# EAGLE board Maze Solver (EAGLE 9.7.0)

Size 395.68 x 148.72 mm. Coordinates in mm from the lower left corner, seen from the top.
Outline: 0,0 395.68,0 395.68,148.72 0,148.72 0,0
Copper layers (1*16): Top 0.035mm / dielectric 1.5mm / Bottom 0.035mm
Design rules "default": minimum track width 6mil, minimum drill 0.35mm, track to track 6mil, track to pad 6mil, pad to pad 6mil, via to via 6mil, smd to smd 6mil, copper to edge 40mil, drill to drill 6mil, minimum pad ring 10mil, minimum via ring 8mil, stop-mask expansion 4mil, vias tented up to drill 0mil, thermal gap 10mil

## Footprints (pad centres in the part's own frame; a part is rotated, then mirrored left to right if it is on the bottom)
BATTERY-GENERIC = drill 1.118 pad 3.15 octagon: + 2.54,0; - -2.54,0
HC-SR04 = drill 1.016 long: 1 -3.81,0; 2 -1.27,0; 3 1.27,0; 4 3.81,0
MOTOR = drill 1.118 pad 3.15 octagon: + 2.54,0; - -2.54,0
RESAD1016W63L850D250B = drill 0.83 pad 1.43: 1 -5.08,0; 2 5.08,0
HA-06-SM065 = drill 1 pad 1.676: 1 -2.54,-2.54; 2 0,2.54; 3 2.54,-2.54
ARDUINO-UNO-R3-SHIELD = drill 1.016 pad 1.88: 3.3V 24.13,-2.54; 5V 24.13,0; A0 24.13,12.7; A1 24.13,15.24; A2 24.13,17.78; A3 24.13,20.32; A4 24.13,22.86; A5 24.13,25.4; AREF -24.13,-13.97; D2 -24.13,20.32; D3 -24.13,17.78; D4 -24.13,15.24; D5 -24.13,12.7; D6 -24.13,10.16; D7 -24.13,7.62; D8 -24.13,3.81; D9 -24.13,1.27; D10 -24.13,-1.27; D11 -24.13,-3.81; D12 -24.13,-6.35; D13 -24.13,-8.89; GND@0 24.13,2.54; GND@1 24.13,5.08; GND@2 -24.13,-11.43; IOREF 24.13,-7.62; NC 24.13,-10.16; RES 24.13,-5.08; RX -24.13,25.4; SCL -24.13,-19.05; SDA -24.13,-16.51; TX -24.13,22.86; VIN 24.13,7.62
DIP762W53P254L1969H508Q16B = drill 0.743 pad 1.343: 1 -3.81,8.89; 2 -3.81,6.35; 3 -3.81,3.81; 4 -3.81,1.27; 5 -3.81,-1.27; 6 -3.81,-3.81; 7 -3.81,-6.35; 8 -3.81,-8.89; 9 3.81,-8.89; 10 3.81,-6.35; 11 3.81,-3.81; 12 3.81,-1.27; 13 3.81,1.27; 14 3.81,3.81; 15 3.81,6.35; 16 3.81,8.89
JHD-162A = drill 1.016 long: 1 -19.05,0; 2 -16.51,0; 3 -13.97,0; 4 -11.43,0; 5 -8.89,0; 6 -6.35,0; 7 -3.81,0; 8 -1.27,0; 9 1.27,0; 10 3.81,0; 11 6.35,0; 12 8.89,0; 13 11.43,0; 14 13.97,0; 15 16.51,0; 16 19.05,0

## Placement (x,y rotation side)
BAT1  9V  [BATTERY-GENERIC]  146.99,70.8 180 top
DIST1  DISTANCE-SENSOR-4PINHC-SR04  [HC-SR04]  346.43,108.37 0 top
DIST2  DISTANCE-SENSOR-4PINHC-SR04  [HC-SR04]  346.43,80.43 180 top
DIST3  DISTANCE-SENSOR-4PINHC-SR04  [HC-SR04]  388.06,94.47 270 top
M2  MOTOR_HDR  [MOTOR]  168.84,89.9 180 top
M4  MOTOR_HDR  [MOTOR]  168.66,115.42 0 top
M6  MOTOR_HDR  [MOTOR]  112.95,116.03 0 top
M7  MOTOR_HDR  [MOTOR]  112.95,90.63 180 top
R4  1k  [RESAD1016W63L850D250B]  53.9,44.12 90 top
RPOT1  250k  [HA-06-SM065]  85.01,93.17 0 top
U1  ARDUINO-UNO-R3-SHIELD  [ARDUINO-UNO-R3-SHIELD]  29.84,100.84 180 top
U2  L293E  [DIP762W53P254L1969H508Q16B]  139.62,102.06 90 top
U3  LCD-16X2JHD-162A  [JHD-162A]  34.85,36.63 0 top
U7  ARDUINO-UNO-R3-SHIELD  [ARDUINO-UNO-R3-SHIELD]  259.38,92.18 270 top

## Library data of the parts
BAT1 DIST1-DIST3 M2 M4 M6 M7 R4 RPOT1 U1-U3 U7 = Tinkercad

## Nets
BAT1+: BAT1.+ U2.8 U2.16
BAT1-: BAT1.- U2.4 U2.5 U2.12 U2.13
M2_+: M2.+ M7.+ U2.3
M2_-: M2.- M7.- U2.6
M4_+: M4.+ M6.+ U2.11
M4_-: M4.- M6.- U2.14
U1_5V: RPOT1.1 U1.5V U3.2 U3.15
U1_A0: U1.A0 U3.6
U1_A1: U1.A1 U3.11
U1_A2: U1.A2 U3.12
U1_A3: U1.A3 U3.13
U1_A4: U1.A4 U3.14
U1_A5: RPOT1.2 U1.A5
U1_D2: U1.D2 U2.7
U1_D3: U1.D3 U2.1
U1_D4: U1.D4 U2.10
U1_D5: U1.D5 U2.15
U1_D6: U1.D6 U2.9
U1_D7: U1.D7 U2.2
U1_D13: U1.D13 U3.4
U1_GND: R4.2 RPOT1.3 U1.GND@0 U1.GND@1 U1.GND@2 U3.1 U3.3 U3.5
U3_LED-: R4.1 U3.16
U7_5V: DIST1.1 DIST2.1 DIST3.1 U7.5V
U7_D2: DIST2.3 U7.D2
U7_D3: DIST2.2 U7.D3
U7_D4: DIST1.3 U7.D4
U7_D5: DIST1.2 U7.D5
U7_D6: DIST3.3 U7.D6
U7_D7: DIST3.2 U7.D7
U7_D11: U1.D8 U7.D11
U7_D12: U1.D9 U7.D12
U7_D13: U1.D10 U7.D13
U7_GND: DIST1.4 DIST2.4 DIST3.4 U7.GND@0 U7.GND@1 U7.GND@2
U7_TX: U1.RX U7.TX

## Tracks (layer width: path | path; a pad name or v marks a point on that pad's centre or on a via)
BAT1+  (2 unrouted)
BAT1-  (4 unrouted)
M2_+  (2 unrouted)
M2_-  (2 unrouted)
M4_+  (2 unrouted)
M4_-  (2 unrouted)
U1_5V  (3 unrouted)
U1_A0  (1 unrouted)
U1_A1  (1 unrouted)
U1_A2  (1 unrouted)
U1_A3  (1 unrouted)
U1_A4  (1 unrouted)
U1_A5  (1 unrouted)
U1_D2  (1 unrouted)
U1_D3  (1 unrouted)
U1_D4  (1 unrouted)
U1_D5  (1 unrouted)
U1_D6  (1 unrouted)
U1_D7  (1 unrouted)
U1_D13  (1 unrouted)
U1_GND  (7 unrouted)
U3_LED-  (1 unrouted)
U7_5V  (3 unrouted)
U7_D2  (1 unrouted)
U7_D3  (1 unrouted)
U7_D4  (1 unrouted)
U7_D5  (1 unrouted)
U7_D6  (1 unrouted)
U7_D7  (1 unrouted)
U7_D11  (1 unrouted)
U7_D12  (1 unrouted)
U7_D13  (1 unrouted)
U7_GND  (5 unrouted)
U7_TX  (1 unrouted)